# EAGLE board Q GPS (EAGLE 7.7.0), part 1 of 2
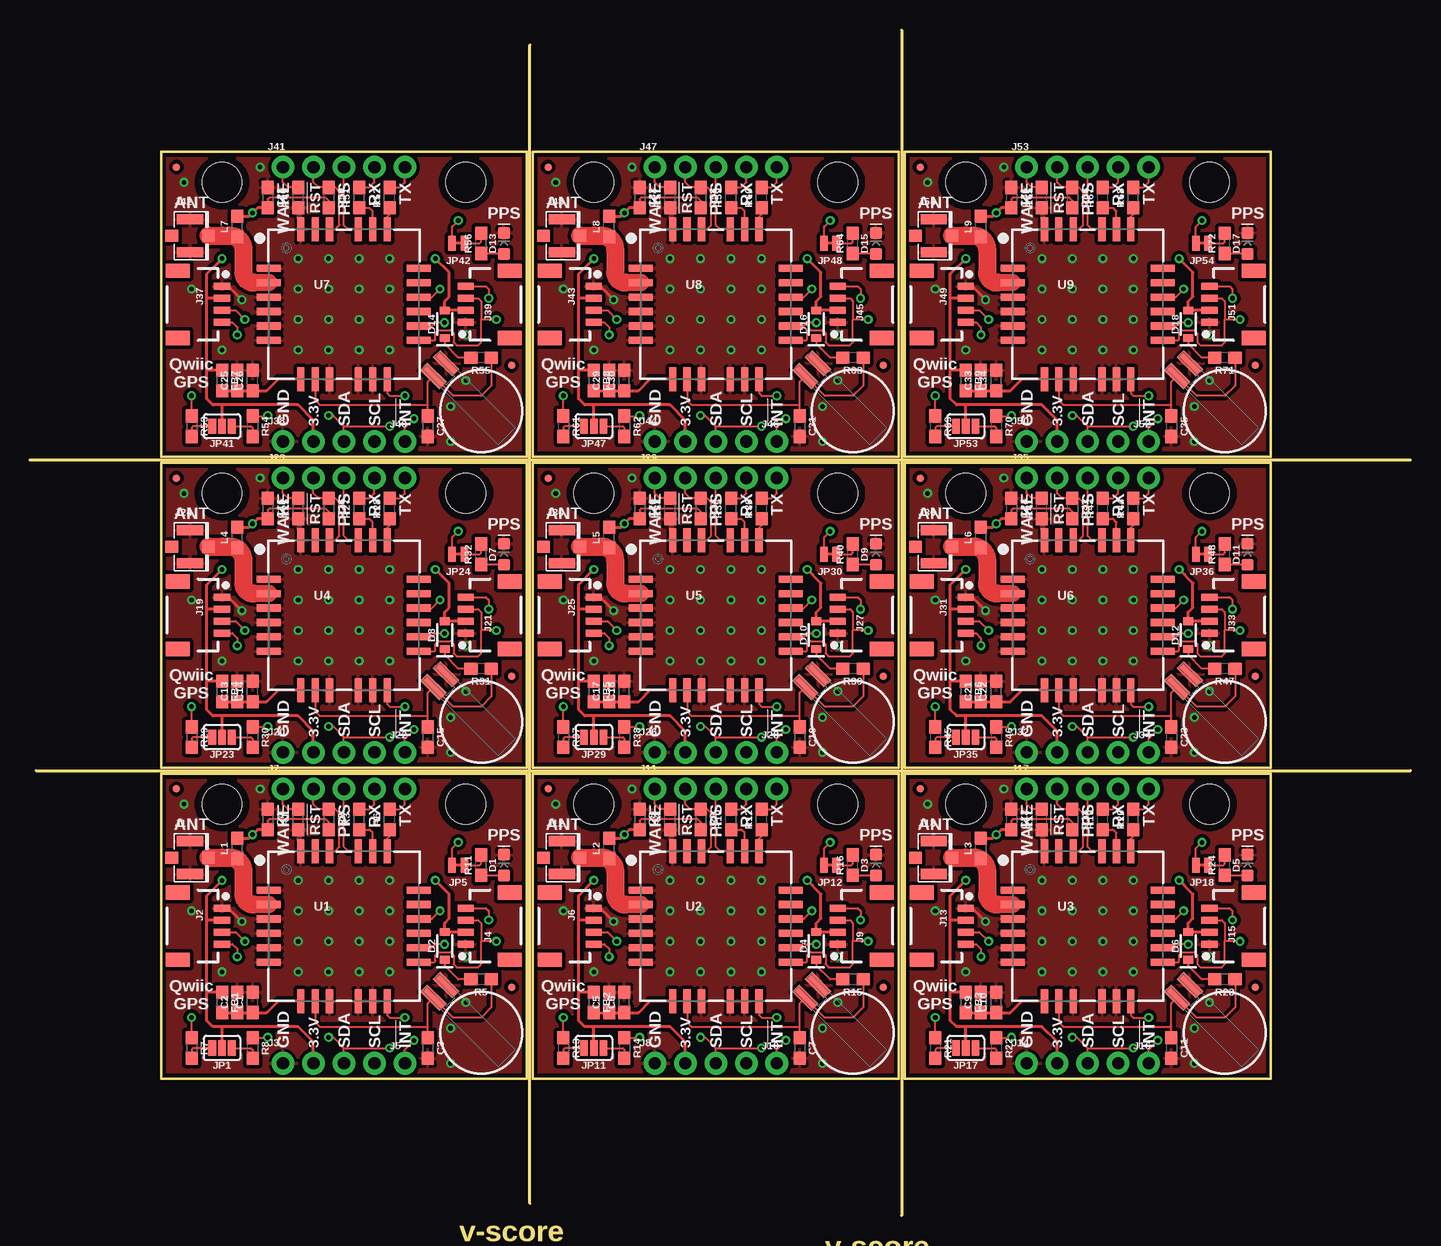
[diagram p0: board, top side]
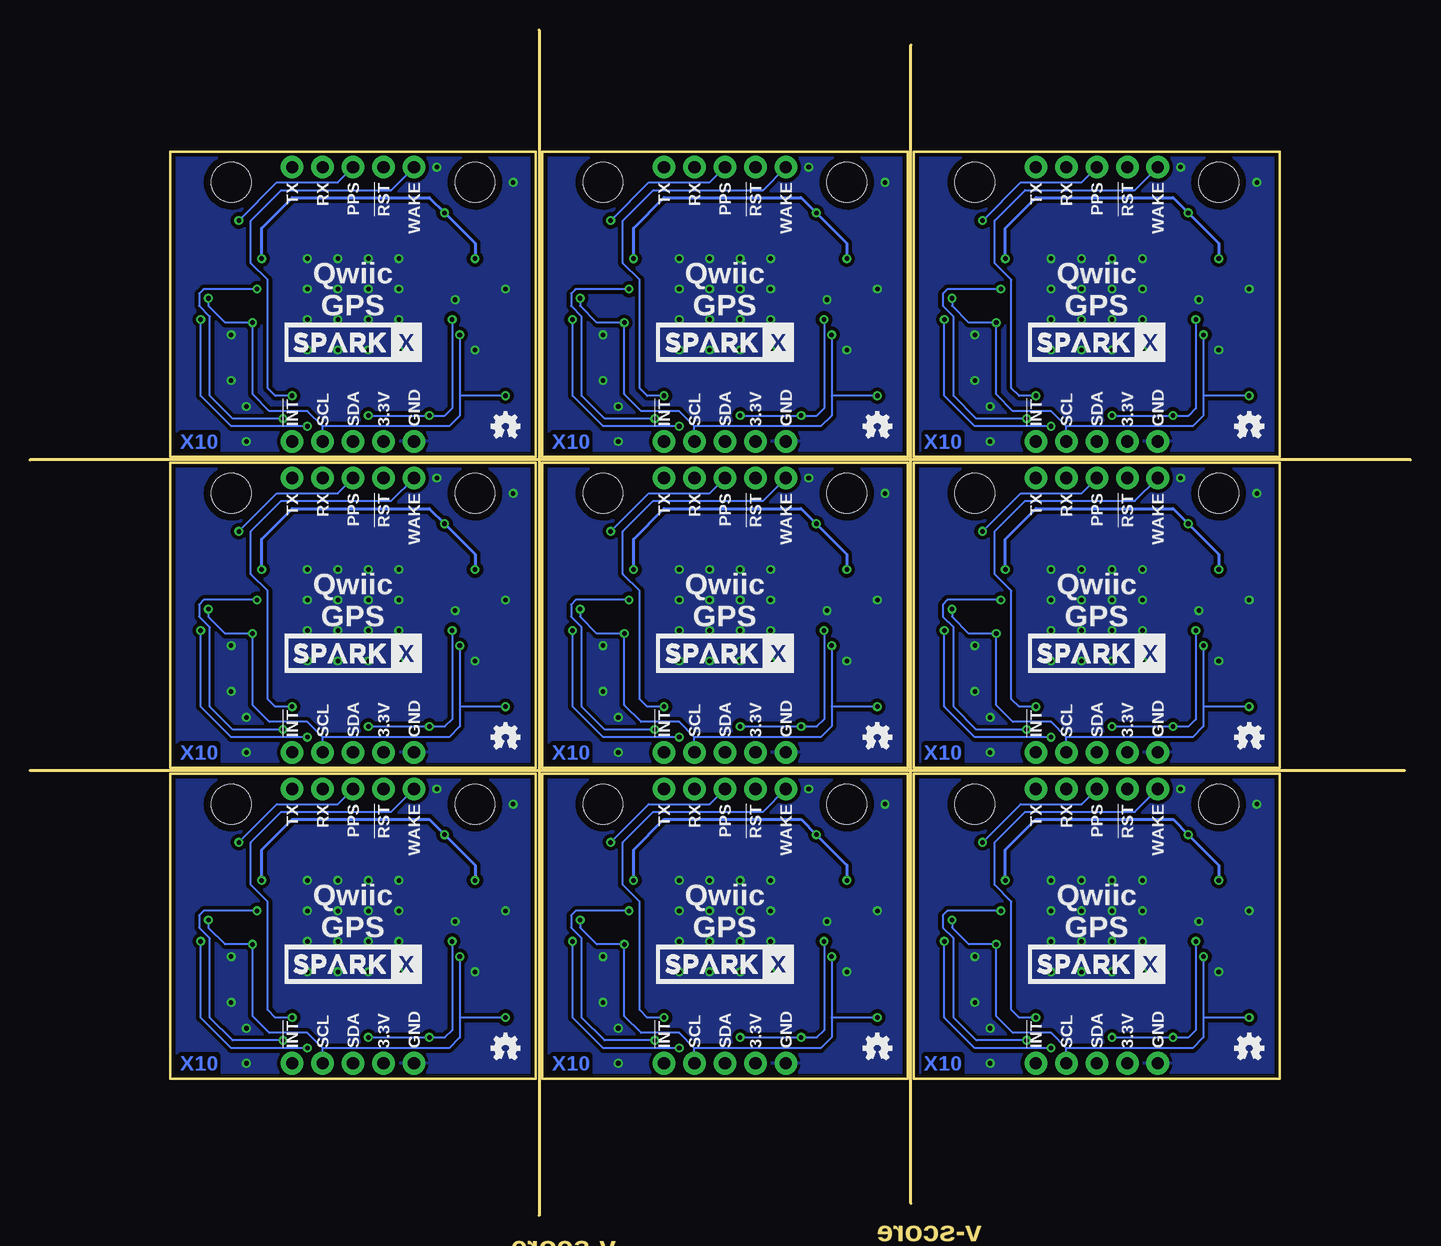
[diagram p1: board, bottom side, seen from below]

Size 115.06 x 98.81 mm. Coordinates in mm from the lower left corner, seen from the top.
Outline: 0,62.99 115.06,62.99
Outline: 72.64,98.81 72.64,0
Outline: 41.66,1.02 41.66,97.54
Outline: 0.51,37.08 115.06,37.08
Outline: 10.92,11.43 10.92,36.83 41.4,36.83 41.4,11.43 10.92,11.43
Outline: 41.91,11.43 41.91,36.83 72.39,36.83 72.39,11.43 41.91,11.43
Outline: 72.9,11.43 72.9,36.83 103.38,36.83 103.38,11.43 72.9,11.43
Outline: 10.92,37.34 10.92,62.74 41.4,62.74 41.4,37.34 10.92,37.34
Outline: 41.91,37.34 41.91,62.74 72.39,62.74 72.39,37.34 41.91,37.34
Outline: 72.9,37.34 72.9,62.74 103.38,62.74 103.38,37.34 72.9,37.34
Outline: 10.92,63.25 10.92,88.65 41.4,88.65 41.4,63.25 10.92,63.25
Outline: 41.91,63.25 41.91,88.65 72.39,88.65 72.39,63.25 41.91,63.25
Outline: 72.9,63.25 72.9,88.65 103.38,88.65 103.38,63.25 72.9,63.25
Copper layers (1*16): Top 0.035mm / dielectric 1.5mm / Bottom 0.035mm
Design rules "SparkFun-2-layer-TIGHT": minimum track width 7mil, minimum drill 15mil, track to track 7mil, track to pad 7mil, pad to pad 7mil, via to via 7mil, smd to smd 7mil, copper to edge 7mil, drill to drill 7mil, minimum pad ring 7mil, minimum via ring 7mil, stop-mask expansion 4mil, vias tented up to drill 25mil, thermal gap 10mil

## Footprints (pad centres in the part's own frame; a part is rotated, then mirrored left to right if it is on the bottom)
6.8MM_COIN_CELL = smd 2.25 x 0.85: + 4.87,0.75; - 4.87,-0.75
0603 = smd 1.1 x 1: 1 -0.85,0; 2 0.85,0
LED-0603 = smd 1 x 1: A -0.877,0; C 0.877,0
SOD-323 = smd 0.63 x 0.83: A 1.15,0; C -1.15,0
U.FL = smd 2.2 x 0.85: 1 0,1.375; 2 0,-1.375 | smd 1.05 x 1: FEED 1.525,0; NC -1.525,0
1X04_1MM_RA = smd 0.6 x 1.35: 1 -1.5,0; 2 -0.5,0; 3 0.5,0; 4 1.5,0 | smd 1.2 x 2: NC1 2.8,-3.675; NC2 -2.8,-3.675
1X04_NO_SILK = drill 1.016 pad 1.88: 1 0,0; 2 2.54,0; 3 5.08,0; 4 7.62,0
1X01_NO_SILK = drill 1.016 pad 1.88: 1 0,0
1X05_NO_SILK = drill 1.016 pad 1.88: 1 0,0; 2 2.54,0; 3 5.08,0; 4 7.62,0; 5 10.16,0
SMT-JUMPER_3_2-NC_PASTE_SILK = smd 0.635 x 1.27: 1 -0.813,0; 2 0,0; 3 0.813,0
MICRO-FIDUCIAL = smd 0.635 x 0.635: 1 0,0
STAND-OFF = hole 3.302: 0,0
SMT-JUMPER_2_NC_TRACE_NO-SILK = smd 0.635 x 1.27: 1 -0.508,0; 2 0.508,0
TITAN_X1_GPS = smd 2 x 0.6: 1 -6.25,3; 2 -6.25,1.8; 3 -6.25,0.6; 4 -6.25,-0.6; 5 -6.25,-1.8; 6 -6.25,-3; 13 6.25,-3; 14 6.25,-1.8; 15 6.25,-0.6; 16 6.25,0.6; 17 6.25,1.8; 18 6.25,3 | smd 0.6 x 2: 7 -3.6,-6.25; 8 -2.4,-6.25; 9 -1.2,-6.25; 10 1.2,-6.25; 11 2.4,-6.25; 12 3.6,-6.25; 19 3.6,6.25; 20 2.4,6.25; 21 1.2,6.25; 22 -1.2,6.25; 23 -2.4,6.25; 24 -3.6,6.25

## Placement (x,y rotation side)
B1  COIN CELL  [6.8MM_COIN_CELL]  37.59,15.24 135 top
B2  COIN CELL  [6.8MM_COIN_CELL]  68.58,15.24 135 top
B3  COIN CELL  [6.8MM_COIN_CELL]  99.57,15.24 135 top
B4  COIN CELL  [6.8MM_COIN_CELL]  37.59,41.15 135 top
B5  COIN CELL  [6.8MM_COIN_CELL]  68.58,41.15 135 top
B6  COIN CELL  [6.8MM_COIN_CELL]  99.57,41.15 135 top
B7  COIN CELL  [6.8MM_COIN_CELL]  37.59,67.06 135 top
B8  COIN CELL  [6.8MM_COIN_CELL]  68.58,67.06 135 top
B9  COIN CELL  [6.8MM_COIN_CELL]  99.57,67.06 135 top
C1  0.1uF  [0603]  18.54,17.78 90 top
C2  1.0uF  [0603]  17.27,17.78 90 top
C3  1.0uF  [0603]  33.15,13.97 270 top
C4  1.0uF  [0603]  19.81,33.02 270 top
C5  1.0uF  [0603]  48.26,17.78 90 top
C6  0.1uF  [0603]  49.53,17.78 90 top
C7  1.0uF  [0603]  64.14,13.97 270 top
C8  1.0uF  [0603]  50.8,33.02 270 top
C9  1.0uF  [0603]  79.25,17.78 90 top
C10  0.1uF  [0603]  80.52,17.78 90 top
C11  1.0uF  [0603]  95.12,13.97 270 top
C12  1.0uF  [0603]  81.79,33.02 270 top
C13  1.0uF  [0603]  17.27,43.69 90 top
C14  0.1uF  [0603]  18.54,43.69 90 top
C15  1.0uF  [0603]  33.15,39.88 270 top
C16  1.0uF  [0603]  19.81,58.93 270 top
C17  1.0uF  [0603]  48.26,43.69 90 top
C18  0.1uF  [0603]  49.53,43.69 90 top
C19  1.0uF  [0603]  64.14,39.88 270 top
C20  1.0uF  [0603]  50.8,58.93 270 top
C21  1.0uF  [0603]  79.25,43.69 90 top
C22  0.1uF  [0603]  80.52,43.69 90 top
C23  1.0uF  [0603]  95.12,39.88 270 top
C24  1.0uF  [0603]  81.79,58.93 270 top
C25  1.0uF  [0603]  17.27,69.6 90 top
C26  0.1uF  [0603]  18.54,69.6 90 top
C27  1.0uF  [0603]  33.15,65.79 270 top
C28  1.0uF  [0603]  19.81,84.84 270 top
C29  1.0uF  [0603]  48.26,69.6 90 top
C30  0.1uF  [0603]  49.53,69.6 90 top
C31  1.0uF  [0603]  64.14,65.79 270 top
C32  1.0uF  [0603]  50.8,84.84 270 top
C33  1.0uF  [0603]  79.25,69.6 90 top
C34  0.1uF  [0603]  80.52,69.6 90 top
C35  1.0uF  [0603]  95.12,65.79 270 top
C36  1.0uF  [0603]  81.79,84.84 270 top
D1  BLUE  [LED-0603]  39.5,29.21 90 top
D2  0.5A/40V/420mV  [SOD-323]  34.54,22.48 90 top
D3  BLUE  [LED-0603]  70.48,29.21 90 top
D4  0.5A/40V/420mV  [SOD-323]  65.53,22.48 90 top
D5  BLUE  [LED-0603]  101.47,29.21 90 top
D6  0.5A/40V/420mV  [SOD-323]  96.52,22.48 90 top
D7  BLUE  [LED-0603]  39.5,55.12 90 top
D8  0.5A/40V/420mV  [SOD-323]  34.54,48.39 90 top
D9  BLUE  [LED-0603]  70.48,55.12 90 top
D10  0.5A/40V/420mV  [SOD-323]  65.53,48.39 90 top
D11  BLUE  [LED-0603]  101.47,55.12 90 top
D12  0.5A/40V/420mV  [SOD-323]  96.52,48.39 90 top
D13  BLUE  [LED-0603]  39.5,81.03 90 top
D14  0.5A/40V/420mV  [SOD-323]  34.54,74.3 90 top
D15  BLUE  [LED-0603]  70.48,81.03 90 top
D16  0.5A/40V/420mV  [SOD-323]  65.53,74.3 90 top
D17  BLUE  [LED-0603]  101.47,81.03 90 top
D18  0.5A/40V/420mV  [SOD-323]  96.52,74.3 90 top
FB1  600Ohm/100MHz  [0603]  16,17.78 270 top
FB2  600Ohm/100MHz  [0603]  46.99,17.78 270 top
FB3  600Ohm/100MHz  [0603]  77.98,17.78 270 top
FB4  600Ohm/100MHz  [0603]  16,43.69 270 top
FB5  600Ohm/100MHz  [0603]  46.99,43.69 270 top
FB6  600Ohm/100MHz  [0603]  77.98,43.69 270 top
FB7  600Ohm/100MHz  [0603]  16,69.6 270 top
FB8  600Ohm/100MHz  [0603]  46.99,69.6 270 top
FB9  600Ohm/100MHz  [0603]  77.98,69.6 270 top
J1  U.FL  [U.FL]  13.34,29.84 0 top
J2  SMD  [1X04_1MM_RA]  16,24.13 270 top
J3  PTH  [1X04_NO_SILK]  21.08,12.7 0 top
J4  SMD  [1X04_1MM_RA]  36.32,24.13 90 top
J5  [1X01_NO_SILK]  31.24,12.7 0 top
J6  SMD  [1X04_1MM_RA]  46.99,24.13 270 top
J7  [1X05_NO_SILK]  21.08,35.56 0 top
J8  PTH  [1X04_NO_SILK]  52.07,12.7 0 top
J9  SMD  [1X04_1MM_RA]  67.31,24.13 90 top
J10  [1X01_NO_SILK]  62.23,12.7 0 top
J11  [1X05_NO_SILK]  52.07,35.56 0 top
J12  U.FL  [U.FL]  44.32,29.84 0 top
J13  SMD  [1X04_1MM_RA]  77.98,24.13 270 top
J14  PTH  [1X04_NO_SILK]  83.06,12.7 0 top
J15  SMD  [1X04_1MM_RA]  98.3,24.13 90 top
J16  [1X01_NO_SILK]  93.22,12.7 0 top
J17  [1X05_NO_SILK]  83.06,35.56 0 top
J18  U.FL  [U.FL]  75.31,29.84 0 top
J19  SMD  [1X04_1MM_RA]  16,50.04 270 top
J20  PTH  [1X04_NO_SILK]  21.08,38.61 0 top
J21  SMD  [1X04_1MM_RA]  36.32,50.04 90 top
J22  [1X01_NO_SILK]  31.24,38.61 0 top
J23  [1X05_NO_SILK]  21.08,61.47 0 top
J24  U.FL  [U.FL]  13.34,55.75 0 top
J25  SMD  [1X04_1MM_RA]  46.99,50.04 270 top
J26  PTH  [1X04_NO_SILK]  52.07,38.61 0 top
J27  SMD  [1X04_1MM_RA]  67.31,50.04 90 top
J28  [1X01_NO_SILK]  62.23,38.61 0 top
J29  [1X05_NO_SILK]  52.07,61.47 0 top
J30  U.FL  [U.FL]  44.32,55.75 0 top
J31  SMD  [1X04_1MM_RA]  77.98,50.04 270 top
J32  PTH  [1X04_NO_SILK]  83.06,38.61 0 top
J33  SMD  [1X04_1MM_RA]  98.3,50.04 90 top
J34  [1X01_NO_SILK]  93.22,38.61 0 top
J35  [1X05_NO_SILK]  83.06,61.47 0 top
J36  U.FL  [U.FL]  75.31,55.75 0 top
J37  SMD  [1X04_1MM_RA]  16,75.95 270 top
J38  PTH  [1X04_NO_SILK]  21.08,64.52 0 top
J39  SMD  [1X04_1MM_RA]  36.32,75.95 90 top
J40  [1X01_NO_SILK]  31.24,64.52 0 top
J41  [1X05_NO_SILK]  21.08,87.38 0 top
J42  U.FL  [U.FL]  13.34,81.66 0 top
J43  SMD  [1X04_1MM_RA]  46.99,75.95 270 top
J44  PTH  [1X04_NO_SILK]  52.07,64.52 0 top
J45  SMD  [1X04_1MM_RA]  67.31,75.95 90 top
J46  [1X01_NO_SILK]  62.23,64.52 0 top
J47  [1X05_NO_SILK]  52.07,87.38 0 top
J48  U.FL  [U.FL]  44.32,81.66 0 top
J49  SMD  [1X04_1MM_RA]  77.98,75.95 270 top
J50  PTH  [1X04_NO_SILK]  83.06,64.52 0 top
J51  SMD  [1X04_1MM_RA]  98.3,75.95 90 top
J52  [1X01_NO_SILK]  93.22,64.52 0 top
J53  [1X05_NO_SILK]  83.06,87.38 0 top
J54  U.FL  [U.FL]  75.31,81.66 0 top
JP1  [SMT-JUMPER_3_2-NC_PASTE_SILK]  16,13.97 180 top
JP2  FIDUCIALUFIDUCIAL  [MICRO-FIDUCIAL]  40.13,19.05 0 top
JP3  STAND-OFF  [STAND-OFF]  16,34.29 0 top
JP4  STAND-OFF  [STAND-OFF]  36.32,34.29 0 top
JP5  [SMT-JUMPER_2_NC_TRACE_NO-SILK]  35.69,29.21 180 top
JP6  FIDUCIALUFIDUCIAL  [MICRO-FIDUCIAL]  12.19,35.56 0 top
JP7  STAND-OFF  [STAND-OFF]  46.99,34.29 0 top
JP8  STAND-OFF  [STAND-OFF]  67.31,34.29 0 top
JP9  FIDUCIALUFIDUCIAL  [MICRO-FIDUCIAL]  71.12,19.05 0 top
JP10  FIDUCIALUFIDUCIAL  [MICRO-FIDUCIAL]  43.18,35.56 0 top
JP11  [SMT-JUMPER_3_2-NC_PASTE_SILK]  46.99,13.97 180 top
JP12  [SMT-JUMPER_2_NC_TRACE_NO-SILK]  66.67,29.21 180 top
JP13  STAND-OFF  [STAND-OFF]  77.98,34.29 0 top
JP14  STAND-OFF  [STAND-OFF]  98.3,34.29 0 top
JP15  FIDUCIALUFIDUCIAL  [MICRO-FIDUCIAL]  102.11,19.05 0 top
JP16  FIDUCIALUFIDUCIAL  [MICRO-FIDUCIAL]  74.17,35.56 0 top
JP17  [SMT-JUMPER_3_2-NC_PASTE_SILK]  77.98,13.97 180 top
JP18  [SMT-JUMPER_2_NC_TRACE_NO-SILK]  97.66,29.21 180 top
JP19  STAND-OFF  [STAND-OFF]  16,60.2 0 top
JP20  STAND-OFF  [STAND-OFF]  36.32,60.2 0 top
JP21  FIDUCIALUFIDUCIAL  [MICRO-FIDUCIAL]  40.13,44.96 0 top
JP22  FIDUCIALUFIDUCIAL  [MICRO-FIDUCIAL]  12.19,61.47 0 top
JP23  [SMT-JUMPER_3_2-NC_PASTE_SILK]  16,39.88 180 top
JP24  [SMT-JUMPER_2_NC_TRACE_NO-SILK]  35.69,55.12 180 top
JP25  STAND-OFF  [STAND-OFF]  46.99,60.2 0 top
JP26  STAND-OFF  [STAND-OFF]  67.31,60.2 0 top
JP27  FIDUCIALUFIDUCIAL  [MICRO-FIDUCIAL]  71.12,44.96 0 top
JP28  FIDUCIALUFIDUCIAL  [MICRO-FIDUCIAL]  43.18,61.47 0 top
JP29  [SMT-JUMPER_3_2-NC_PASTE_SILK]  46.99,39.88 180 top
JP30  [SMT-JUMPER_2_NC_TRACE_NO-SILK]  66.67,55.12 180 top
JP31  STAND-OFF  [STAND-OFF]  77.98,60.2 0 top
JP32  STAND-OFF  [STAND-OFF]  98.3,60.2 0 top
JP33  FIDUCIALUFIDUCIAL  [MICRO-FIDUCIAL]  102.11,44.96 0 top
JP34  FIDUCIALUFIDUCIAL  [MICRO-FIDUCIAL]  74.17,61.47 0 top
JP35  [SMT-JUMPER_3_2-NC_PASTE_SILK]  77.98,39.88 180 top
JP36  [SMT-JUMPER_2_NC_TRACE_NO-SILK]  97.66,55.12 180 top
JP37  STAND-OFF  [STAND-OFF]  16,86.11 0 top
JP38  STAND-OFF  [STAND-OFF]  36.32,86.11 0 top
JP39  FIDUCIALUFIDUCIAL  [MICRO-FIDUCIAL]  40.13,70.87 0 top
JP40  FIDUCIALUFIDUCIAL  [MICRO-FIDUCIAL]  12.19,87.38 0 top
JP41  [SMT-JUMPER_3_2-NC_PASTE_SILK]  16,65.79 180 top
JP42  [SMT-JUMPER_2_NC_TRACE_NO-SILK]  35.69,81.03 180 top
JP43  STAND-OFF  [STAND-OFF]  46.99,86.11 0 top
JP44  STAND-OFF  [STAND-OFF]  67.31,86.11 0 top
JP45  FIDUCIALUFIDUCIAL  [MICRO-FIDUCIAL]  71.12,70.87 0 top
JP46  FIDUCIALUFIDUCIAL  [MICRO-FIDUCIAL]  43.18,87.38 0 top
JP47  [SMT-JUMPER_3_2-NC_PASTE_SILK]  46.99,65.79 180 top
JP48  [SMT-JUMPER_2_NC_TRACE_NO-SILK]  66.67,81.03 180 top
JP49  STAND-OFF  [STAND-OFF]  77.98,86.11 0 top
JP50  STAND-OFF  [STAND-OFF]  98.3,86.11 0 top
JP51  FIDUCIALUFIDUCIAL  [MICRO-FIDUCIAL]  102.11,70.87 0 top
JP52  FIDUCIALUFIDUCIAL  [MICRO-FIDUCIAL]  74.17,87.38 0 top
JP53  [SMT-JUMPER_3_2-NC_PASTE_SILK]  77.98,65.79 180 top
JP54  [SMT-JUMPER_2_NC_TRACE_NO-SILK]  97.66,81.03 180 top
L1  33nH/±5%/500mA  [0603]  17.27,30.61 90 top
L2  33nH/±5%/500mA  [0603]  48.26,30.61 90 top
L3  33nH/±5%/500mA  [0603]  79.25,30.61 90 top
L4  33nH/±5%/500mA  [0603]  17.27,56.52 90 top
L5  33nH/±5%/500mA  [0603]  48.26,56.52 90 top
L6  33nH/±5%/500mA  [0603]  79.25,56.52 90 top
L7  33nH/±5%/500mA  [0603]  17.27,82.42 90 top
L8  33nH/±5%/500mA  [0603]  48.26,82.42 90 top
L9  33nH/±5%/500mA  [0603]  79.25,82.42 90 top
LOGO1  OSHW-LOGOMINI  [OSHW-LOGO-MINI]  13.46,13.97 0 bottom
LOGO2  OSHW-LOGOMINI  [OSHW-LOGO-MINI]  44.45,13.97 0 bottom
LOGO3  OSHW-LOGOMINI  [OSHW-LOGO-MINI]  75.44,13.97 0 bottom
LOGO4  OSHW-LOGOMINI  [OSHW-LOGO-MINI]  13.46,39.88 0 bottom
LOGO5  OSHW-LOGOMINI  [OSHW-LOGO-MINI]  44.45,39.88 0 bottom
LOGO6  OSHW-LOGOMINI  [OSHW-LOGO-MINI]  75.44,39.88 0 bottom
LOGO7  OSHW-LOGOMINI  [OSHW-LOGO-MINI]  13.46,65.79 0 bottom
LOGO8  OSHW-LOGOMINI  [OSHW-LOGO-MINI]  44.45,65.79 0 bottom
LOGO9  OSHW-LOGOMINI  [OSHW-LOGO-MINI]  75.44,65.79 0 bottom
R1  10k  [0603]  22.35,33.02 90 top
R2  10k  [0603]  24.89,33.02 270 top
R3  470  [0603]  27.43,33.02 90 top
R4  10k  [0603]  53.34,33.02 90 top
R5  1k  [0603]  37.59,19.69 180 top
R6  470  [0603]  29.97,33.02 90 top
R7  4.7k  [0603]  13.46,13.97 270 top
R8  4.7k  [0603]  18.54,13.97 270 top
R9  10k  [0603]  55.88,33.02 270 top
R10  470  [0603]  58.42,33.02 90 top
R11  470  [0603]  37.59,29.21 90 top
R12  470  [0603]  60.96,33.02 90 top
R13  4.7k  [0603]  44.45,13.97 270 top
R14  4.7k  [0603]  49.53,13.97 270 top
R15  1k  [0603]  68.58,19.69 180 top
R16  470  [0603]  68.58,29.21 90 top
R17  10k  [0603]  84.33,33.02 90 top
R18  10k  [0603]  86.87,33.02 270 top
R19  470  [0603]  89.41,33.02 90 top
R20  470  [0603]  91.95,33.02 90 top
R21  4.7k  [0603]  75.44,13.97 270 top
R22  4.7k  [0603]  80.52,13.97 270 top
R23  1k  [0603]  99.57,19.69 180 top
R24  470  [0603]  99.57,29.21 90 top
R25  10k  [0603]  22.35,58.93 90 top
R26  10k  [0603]  24.89,58.93 270 top
R27  470  [0603]  27.43,58.93 90 top
R28  470  [0603]  29.97,58.93 90 top
R29  4.7k  [0603]  13.46,39.88 270 top
R30  4.7k  [0603]  18.54,39.88 270 top
R31  1k  [0603]  37.59,45.59 180 top
R32  470  [0603]  37.59,55.12 90 top
R33  10k  [0603]  53.34,58.93 90 top
R34  10k  [0603]  55.88,58.93 270 top
R35  470  [0603]  58.42,58.93 90 top
R36  470  [0603]  60.96,58.93 90 top
R37  4.7k  [0603]  44.45,39.88 270 top
R38  4.7k  [0603]  49.53,39.88 270 top
R39  1k  [0603]  68.58,45.59 180 top
R40  470  [0603]  68.58,55.12 90 top
R41  10k  [0603]  84.33,58.93 90 top
R42  10k  [0603]  86.87,58.93 270 top
R43  470  [0603]  89.41,58.93 90 top
R44  470  [0603]  91.95,58.93 90 top
R45  4.7k  [0603]  75.44,39.88 270 top
R46  4.7k  [0603]  80.52,39.88 270 top
R47  1k  [0603]  99.57,45.59 180 top
R48  470  [0603]  99.57,55.12 90 top
R49  10k  [0603]  22.35,84.84 90 top
R50  10k  [0603]  24.89,84.84 270 top
R51  470  [0603]  27.43,84.84 90 top
R52  470  [0603]  29.97,84.84 90 top
R53  4.7k  [0603]  13.46,65.79 270 top
R54  4.7k  [0603]  18.54,65.79 270 top
R55  1k  [0603]  37.59,71.5 180 top
R56  470  [0603]  37.59,81.03 90 top
R57  10k  [0603]  53.34,84.84 90 top
R58  10k  [0603]  55.88,84.84 270 top
R59  470  [0603]  58.42,84.84 90 top
R60  470  [0603]  60.96,84.84 90 top
R61  4.7k  [0603]  44.45,65.79 270 top
R62  4.7k  [0603]  49.53,65.79 270 top
R63  1k  [0603]  68.58,71.5 180 top
R64  470  [0603]  68.58,81.03 90 top
R65  10k  [0603]  84.33,84.84 90 top
R66  10k  [0603]  86.87,84.84 270 top
R67  470  [0603]  89.41,84.84 90 top
R68  470  [0603]  91.95,84.84 90 top
R69  4.7k  [0603]  75.44,65.79 270 top
R70  4.7k  [0603]  80.52,65.79 270 top
R71  1k  [0603]  99.57,71.5 180 top
R72  470  [0603]  99.57,81.03 90 top
U1  TITAN X1 GPS  [TITAN_X1_GPS]  26.16,24.13 0 top
U2  TITAN X1 GPS  [TITAN_X1_GPS]  57.15,24.13 0 top
U3  TITAN X1 GPS  [TITAN_X1_GPS]  88.14,24.13 0 top
U4  TITAN X1 GPS  [TITAN_X1_GPS]  26.16,50.04 0 top
U5  TITAN X1 GPS  [TITAN_X1_GPS]  57.15,50.04 0 top
U6  TITAN X1 GPS  [TITAN_X1_GPS]  88.14,50.04 0 top
U7  TITAN X1 GPS  [TITAN_X1_GPS]  26.16,75.95 0 top
U8  TITAN X1 GPS  [TITAN_X1_GPS]  57.15,75.95 0 top
U9  TITAN X1 GPS  [TITAN_X1_GPS]  88.14,75.95 0 top
U$1  SPARKX-LOGO5  [SPARKX-LARGE]  26.16,20.95 0 bottom
U$2  SPARKX-LOGO5  [SPARKX-LARGE]  57.15,20.95 0 bottom
U$3  SPARKX-LOGO5  [SPARKX-LARGE]  88.14,20.95 0 bottom
U$4  SPARKX-LOGO5  [SPARKX-LARGE]  26.16,46.86 0 bottom
U$5  SPARKX-LOGO5  [SPARKX-LARGE]  57.15,46.86 0 bottom
U$6  SPARKX-LOGO5  [SPARKX-LARGE]  88.14,46.86 0 bottom
U$7  SPARKX-LOGO5  [SPARKX-LARGE]  26.16,72.77 0 bottom
U$8  SPARKX-LOGO5  [SPARKX-LARGE]  57.15,72.77 0 bottom
U$9  SPARKX-LOGO5  [SPARKX-LARGE]  88.14,72.77 0 bottom

## Library data of the parts
B1-B9 J2-J4 J6 J8 J9 J13-J15 J19-J21 J25-J27 J31-J33 J37-J39 J43-J45 J49-J51 U1-U9 U$1-U$9 = SparkX
C1 C6 C10 C14 C18 C22 C26 C30 C34 = SparkFun-Capacitors; PROD_ID: CAP-00810
C2-C5 C7-C9 C11-C13 C15-C17 C19-C21 C23-C25 C27-C29 C31-C33 C35 C36 = SparkFun-Capacitors; PROD_ID: CAP-00868
D1 D3 D5 D7 D9 D11 D13 D15 D17 = SparkFun-LED; PROD_ID: DIO-08575
D2 D4 D6 D8 D10 D12 D14 D16 D18 = SparkFun-DiscreteSemi; PROD_ID: DIO-10955
FB1-FB9 = SparkFun-Coils; PROD_ID: NDUC-07859
J1 J12 J18 J24 J30 J36 J42 J48 J54 = SparkX; PROD_ID: CONN-09193; SF_ID: WRL-09144
J5 J7 J10 J11 J16 J17 J22 J23 J28 J29 J34 J35 J40 J41 J46 J47 J52 J53 = SparkFun-Connectors
JP1 JP5 JP11 JP12 JP17 JP18 JP23 JP24 JP29 JP30 JP35 JP36 JP41 JP42 JP47 JP48 JP53 JP54 = SparkFun-Jumpers
JP2-JP4 JP6-JP10 JP13-JP16 JP19-JP22 JP25-JP28 JP31-JP34 JP37-JP40 JP43-JP46 JP49-JP52 = SparkFun
L1-L9 = SparkFun-Coils; PROD_ID: NDUC-07874
LOGO1-LOGO9 = SparkFun-Aesthetics
R1 R2 R4 R9 R17 R18 R25 R26 R33 R34 R41 R42 R49 R50 R57 R58 R65 R66 = SparkFun-Resistors; PROD_ID: RES-00824
R3 R6 R10-R12 R16 R19 R20 R24 R27 R28 R32 R35 R36 R40 R43 R44 R48 R51 R52 R56 R59 R60 R64 R67 R68 R72 = SparkFun-Resistors; PROD_ID: RES-07869
R5 R15 R23 R31 R39 R47 R55 R63 R71 = SparkFun-Resistors; PROD_ID: RES-07856
R7 R8 R13 R14 R21 R22 R29 R30 R37 R38 R45 R46 R53 R54 R61 R62 R69 R70 = SparkFun-Resistors; PROD_ID: RES-07857

## Nets
1PPS: J7.3 JP5.2 U1.21
1PPS1: J11.3 JP12.2 U2.21
1PPS2: J17.3 JP18.2 U3.21
1PPS3: J23.3 JP24.2 U4.21
1PPS4: J29.3 JP30.2 U5.21
1PPS5: J35.3 JP36.2 U6.21
1PPS6: J41.3 JP42.2 U7.21
1PPS7: J47.3 JP48.2 U8.21
1PPS8: J53.3 JP54.2 U9.21
3.3V: C4.2 D2.A FB1.1 J2.2 J3.2 J4.2 JP1.2 L1.2 R2.2
3.3V1: C8.2 D4.A FB2.1 J6.2 J8.2 J9.2 JP11.2 L2.2 R9.2
3.3V2: C12.2 D6.A FB3.1 J13.2 J14.2 J15.2 JP17.2 L3.2 R18.2
3.3V3: C16.2 D8.A FB4.1 J19.2 J20.2 J21.2 JP23.2 L4.2 R26.2
3.3V4: C20.2 D10.A FB5.1 J25.2 J26.2 J27.2 JP29.2 L5.2 R34.2
3.3V5: C24.2 D12.A FB6.1 J31.2 J32.2 J33.2 JP35.2 L6.2 R42.2
3.3V6: C28.2 D14.A FB7.1 J37.2 J38.2 J39.2 JP41.2 L7.2 R50.2
3.3V7: C32.2 D16.A FB8.1 J43.2 J44.2 J45.2 JP47.2 L8.2 R58.2
3.3V8: C36.2 D18.A FB9.1 J49.2 J50.2 J51.2 JP53.2 L9.2 R66.2
!RESET: J7.2 R2.1 U1.22
!RESET1: J11.2 R9.1 U2.22
!RESET2: J17.2 R18.1 U3.22
!RESET3: J23.2 R26.1 U4.22
!RESET4: J29.2 R34.1 U5.22
!RESET5: J35.2 R42.1 U6.22
!RESET6: J41.2 R50.1 U7.22
!RESET7: J47.2 R58.1 U8.22
!RESET8: J53.2 R66.1 U9.22
BACKUP: B1.+ C3.1 R5.1 U1.8
BACKUP1: B2.+ C7.1 R15.1 U2.8
BACKUP2: B3.+ C11.1 R23.1 U3.8
BACKUP3: B4.+ C15.1 R31.1 U4.8
BACKUP4: B5.+ C19.1 R39.1 U5.8
BACKUP5: B6.+ C23.1 R47.1 U6.8
BACKUP6: B7.+ C27.1 R55.1 U7.8
BACKUP7: B8.+ C31.1 R63.1 U8.8
BACKUP8: B9.+ C35.1 R71.1 U9.8
EXT_ANT: J1.FEED L1.1 U1.2
EXT_ANT1: J12.FEED L2.1 U2.2
EXT_ANT2: J18.FEED L3.1 U3.2
EXT_ANT3: J24.FEED L4.1 U4.2
EXT_ANT4: J30.FEED L5.1 U5.2
EXT_ANT5: J36.FEED L6.1 U6.2
EXT_ANT6: J42.FEED L7.1 U7.2
EXT_ANT7: J48.FEED L8.1 U8.2
EXT_ANT8: J54.FEED L9.1 U9.2
GND: B1.- C1.2 C2.2 C3.2 C4.1 D1.C J1.1 J1.2 J2.1 J3.1 J4.1 R1.1 U1.1 U1.3 U1.4 U1.5 U1.6 U1.9 U1.10 U1.11 U1.24
GND1: B2.- C5.2 C6.2 C7.2 C8.1 D3.C J6.1 J8.1 J9.1 J12.1 J12.2 R4.1 U2.1 U2.3 U2.4 U2.5 U2.6 U2.9 U2.10 U2.11 U2.24
GND2: B3.- C9.2 C10.2 C11.2 C12.1 D5.C J13.1 J14.1 J15.1 J18.1 J18.2 R17.1 U3.1 U3.3 U3.4 U3.5 U3.6 U3.9 U3.10 U3.11 U3.24
GND3: B4.- C13.2 C14.2 C15.2 C16.1 D7.C J19.1 J20.1 J21.1 J24.1 J24.2 R25.1 U4.1 U4.3 U4.4 U4.5 U4.6 U4.9 U4.10 U4.11 U4.24
GND4: B5.- C17.2 C18.2 C19.2 C20.1 D9.C J25.1 J26.1 J27.1 J30.1 J30.2 R33.1 U5.1 U5.3 U5.4 U5.5 U5.6 U5.9 U5.10 U5.11 U5.24
GND5: B6.- C21.2 C22.2 C23.2 C24.1 D11.C J31.1 J32.1 J33.1 J36.1 J36.2 R41.1 U6.1 U6.3 U6.4 U6.5 U6.6 U6.9 U6.10 U6.11 U6.24
GND6: B7.- C25.2 C26.2 C27.2 C28.1 D13.C J37.1 J38.1 J39.1 J42.1 J42.2 R49.1 U7.1 U7.3 U7.4 U7.5 U7.6 U7.9 U7.10 U7.11 U7.24
GND7: B8.- C29.2 C30.2 C31.2 C32.1 D15.C J43.1 J44.1 J45.1 J48.1 J48.2 R57.1 U8.1 U8.3 U8.4 U8.5 U8.6 U8.9 U8.10 U8.11 U8.24
GND8: B9.- C33.2 C34.2 C35.2 C36.1 D17.C J49.1 J50.1 J51.1 J54.1 J54.2 R65.1 U9.1 U9.3 U9.4 U9.5 U9.6 U9.9 U9.10 U9.11 U9.24
INT: J5.1 U1.16
INT1: J10.1 U2.16
INT2: J16.1 U3.16
INT3: J22.1 U4.16
INT4: J28.1 U5.16
INT5: J34.1 U6.16
INT6: J40.1 U7.16
INT7: J46.1 U8.16
INT8: J52.1 U9.16
N$1: JP11.1 R14.2
N$2: D1.A R11.1
N$3: JP11.3 R13.2
N$4: JP5.1 R11.2
N$5: JP1.1 R8.2
N$6: D2.C R5.2
N$7: D3.A R16.1
N$8: JP1.3 R7.2
N$9: JP12.1 R16.2
N$10: D4.C R15.2
N$11: JP17.1 R22.2
N$12: JP17.3 R21.2
N$13: D5.A R24.1
N$14: JP18.1 R24.2
N$15: D6.C R23.2
N$16: JP23.1 R30.2
N$17: JP23.3 R29.2
N$18: D7.A R32.1
N$19: JP24.1 R32.2
N$20: D8.C R31.2
N$21: JP29.1 R38.2
N$22: JP29.3 R37.2
N$23: D9.A R40.1
N$24: JP30.1 R40.2
N$25: D10.C R39.2
N$26: JP35.1 R46.2
N$27: JP35.3 R45.2
N$28: D11.A R48.1
N$29: JP36.1 R48.2
N$30: D12.C R47.2
N$31: JP41.1 R54.2
N$32: JP41.3 R53.2
N$33: D13.A R56.1
N$34: JP42.1 R56.2
N$35: D14.C R55.2
N$36: JP47.1 R62.2
N$37: JP47.3 R61.2
N$38: D15.A R64.1
N$39: JP48.1 R64.2
N$40: D16.C R63.2
N$41: JP53.1 R70.2
N$42: JP53.3 R69.2
N$43: D17.A R72.1
N$44: JP54.1 R72.2
N$45: D18.C R71.2
RX: J7.4 R3.2
RX1: J11.4 R10.2
RX2: J17.4 R19.2
RX3: J23.4 R27.2
RX4: J29.4 R35.2
RX5: J35.4 R43.2
RX6: J41.4 R51.2
RX7: J47.4 R59.2
RX8: J53.4 R67.2
RXLV: R3.1 U1.20
RXLV1: R10.1 U2.20
RXLV2: R19.1 U3.20
RXLV3: R27.1 U4.20
RXLV4: R35.1 U5.20
RXLV5: R43.1 U6.20
RXLV6: R51.1 U7.20
RXLV7: R59.1 U8.20
RXLV8: R67.1 U9.20
SCL: J2.4 J3.4 J4.4 R7.1 U1.14
SCL1: J6.4 J8.4 J9.4 R13.1 U2.14
SCL2: J13.4 J14.4 J15.4 R21.1 U3.14
SCL3: J19.4 J20.4 J21.4 R29.1 U4.14
SCL4: J25.4 J26.4 J27.4 R37.1 U5.14
SCL5: J31.4 J32.4 J33.4 R45.1 U6.14
SCL6: J37.4 J38.4 J39.4 R53.1 U7.14
SCL7: J43.4 J44.4 J45.4 R61.1 U8.14
SCL8: J49.4 J50.4 J51.4 R69.1 U9.14
SDA: J2.3 J3.3 J4.3 R8.1 U1.13
SDA1: J6.3 J8.3 J9.3 R14.1 U2.13
SDA2: J13.3 J14.3 J15.3 R22.1 U3.13
SDA3: J19.3 J20.3 J21.3 R30.1 U4.13
SDA4: J25.3 J26.3 J27.3 R38.1 U5.13
SDA5: J31.3 J32.3 J33.3 R46.1 U6.13
SDA6: J37.3 J38.3 J39.3 R54.1 U7.13
SDA7: J43.3 J44.3 J45.3 R62.1 U8.13
SDA8: J49.3 J50.3 J51.3 R70.1 U9.13
TX: J7.5 R6.2
TX1: J11.5 R12.2
TX2: J17.5 R20.2
TX3: J23.5 R28.2
TX4: J29.5 R36.2
TX5: J35.5 R44.2
TX6: J41.5 R52.2
TX7: J47.5 R60.2
TX8: J53.5 R68.2
TXLV: R6.1 U1.19
TXLV1: R12.1 U2.19
TXLV2: R20.1 U3.19
TXLV3: R28.1 U4.19
TXLV4: R36.1 U5.19
TXLV5: R44.1 U6.19
TXLV6: R52.1 U7.19
TXLV7: R60.1 U8.19
TXLV8: R68.1 U9.19
VCC_FILTERED: C1.1 C2.1 FB1.2 U1.7
VCC_FILTERED1: C5.1 C6.1 FB2.2 U2.7
VCC_FILTERED2: C9.1 C10.1 FB3.2 U3.7
VCC_FILTERED3: C13.1 C14.1 FB4.2 U4.7
VCC_FILTERED4: C17.1 C18.1 FB5.2 U5.7
VCC_FILTERED5: C21.1 C22.1 FB6.2 U6.7
VCC_FILTERED6: C25.1 C26.1 FB7.2 U7.7
VCC_FILTERED7: C29.1 C30.1 FB8.2 U8.7
VCC_FILTERED8: C33.1 C34.1 FB9.2 U9.7
WAKE: J7.1 R1.2 U1.12
WAKE1: J11.1 R4.2 U2.12
WAKE2: J17.1 R17.2 U3.12
WAKE3: J23.1 R25.2 U4.12
WAKE4: J29.1 R33.2 U5.12
WAKE5: J35.1 R41.2 U6.12
WAKE6: J41.1 R49.2 U7.12
WAKE7: J47.1 R57.2 U8.12
WAKE8: J53.1 R65.2 U9.12